# EAGLE board PCB layout (EAGLE 9.6.2)
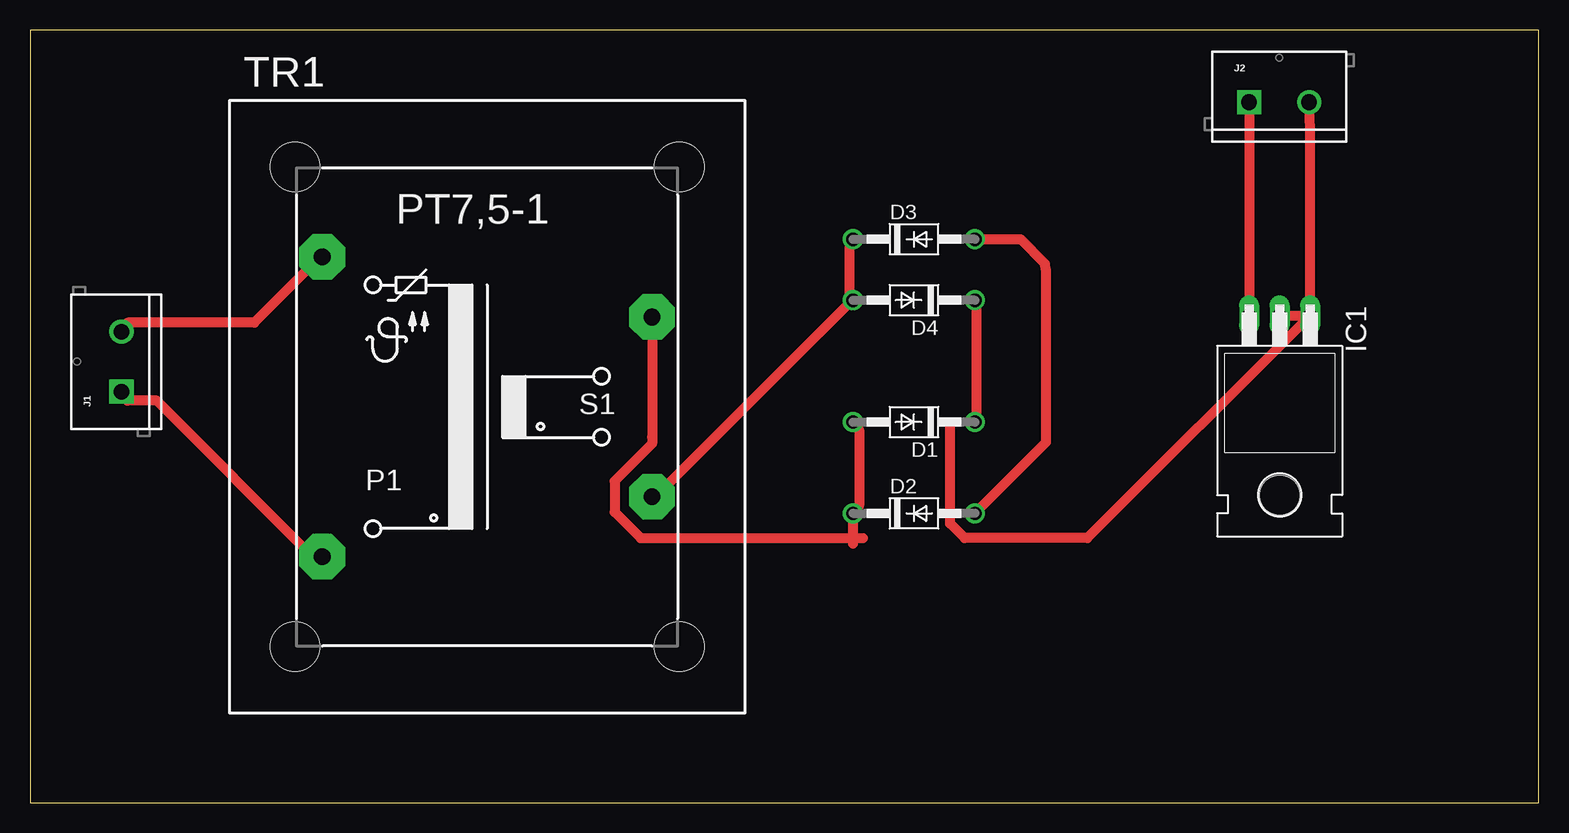
[diagram p0: board, top side]

Size 125.71 x 64.44 mm. Coordinates in mm from the lower left corner, seen from the top.
Outline: 0,0 125.71,0 125.71,64.44 0,64.44 0,0
Copper layers (1*16): Top 0.035mm / dielectric 1.5mm / Bottom 0.035mm
Design rules "default *": minimum track width 32mil, minimum drill 1mm, track to track 32mil, track to pad 32mil, pad to pad 32mil, via to via 32mil, smd to smd 6mil, copper to edge 42mil, drill to drill 16mil, minimum pad ring 10mil, minimum via ring 8mil, stop-mask expansion 4mil, vias tented up to drill 0mil, thermal gap 10mil
Holes 0.35 mm at 68.58,24.13

## Footprints (pad centres in the part's own frame; a part is rotated, then mirrored left to right if it is on the bottom)
DO41-10 = drill 1.118: A 5.08,0; C -5.08,0
TO220H = drill 1.118 long: 1 -2.54,-10.16; 2 0,-10.16; 3 2.54,-10.16 | hole 3.302: 0,4.826
SCREWTERMINAL-5MM-2 = drill 1.3 pad 2.032 square: 1 0,0 | drill 1.3 pad 2.032: 2 5,0
PT07,5-1 = drill 1.397 pad 3.81 octagon: 1 -13.741,12.497; 2 -13.741,-12.497; 3 13.741,-7.493; 4 13.741,7.493 | hole 4.115: -16.002,-19.99; -16.002,19.99; 16.002,19.99; 16.002,-19.99

## Placement (x,y rotation side)
D1  1N4004  [DO41-10]  73.66,31.75 180 top
D2  1N4004  [DO41-10]  73.66,24.13 0 top
D3  1N4004  [DO41-10]  73.66,46.99 0 top
D4  1N4004  [DO41-10]  73.66,41.91 180 top
IC1  7805T  [TO220H]  104.14,30.48 180 top
J1  [SCREWTERMINAL-5MM-2]  7.62,34.29 90 top
J2  [SCREWTERMINAL-5MM-2]  101.6,58.42 0 top
TR1  [PT07,5-1]  38.1,33.02 0 top

## Library data of the parts
D1-D4 = diode
IC1 = linear
J1 J2 = SparkFun-Connectors; SF_SKU: PRT-08432
TR1 = trafo

## Nets
N$1: D1.A D2.C
N$2: D2.A D3.A
N$3: D3.C D4.A TR1.3
N$4: IC1.1 IC1.2 J2.2
N$5: TR1.4
N$6: J1.1 TR1.2
N$7: IC1.3 J2.1
N$8: J1.2 TR1.1
S$1: D1.C D4.C

## Tracks (layer width: path | path; a pad name or v marks a point on that pad's centre or on a via)
N$1
  Top 0.813: D2.C 69.09,24.79 69.09,31.09 D1.A | 68.89,23.82 D2.C | D2.C 69.01,24.13 | D2.C 68.58,21.59
N$2
  Top 0.813: D2.A 84.67,30.06 84.67,44.45 84.6,44.94 82.55,46.99 D3.A
N$3
  Top 0.813: D3.C 68.28,46.23 68.28,42.47 D4.A 68.28,41.66 52.02,25.4 TR1.3
N$4
  Top 0.813: IC1.2 IC1.1 | IC1.1 106.68,56.04 J2.2 | IC1.1 88.11,22.07 77.89,22.07 76.68,23.28 76.68,31.75
N$5
  Top 0.813: TR1.4 51.84,30.48 | 51.84,30.48 51.84,29.94 48.72,26.82 48.72,24.23 50.88,22.07 69.43,22.07 | 51.84,30.48
N$6
  Top 0.813: J1.1 8.13,33.53 10.57,33.53 23.57,20.52 TR1.2
N$7
  Top 0.813: J2.1 IC1.3
N$8
  Top 0.813: J1.2 8.13,40.03 18.69,40.03 23.57,44.91 TR1.1
S$1
  Top 0.813: D1.C 78.84,31.9 78.84,41.81 D4.C